# Altium PCB SkyDriver飞行控制器-IMU板V2.PcbDoc (part 2 of 2)
Units mil, origin at the board's own origin, x right, y up, seen from the top; angles counter-clockwise.
Board outline 1727.64 x 1728.17 mil, 2 copper layers (Top Layer, Bottom Layer); 60 components, 21 nets, 223 pads, 63 vias.
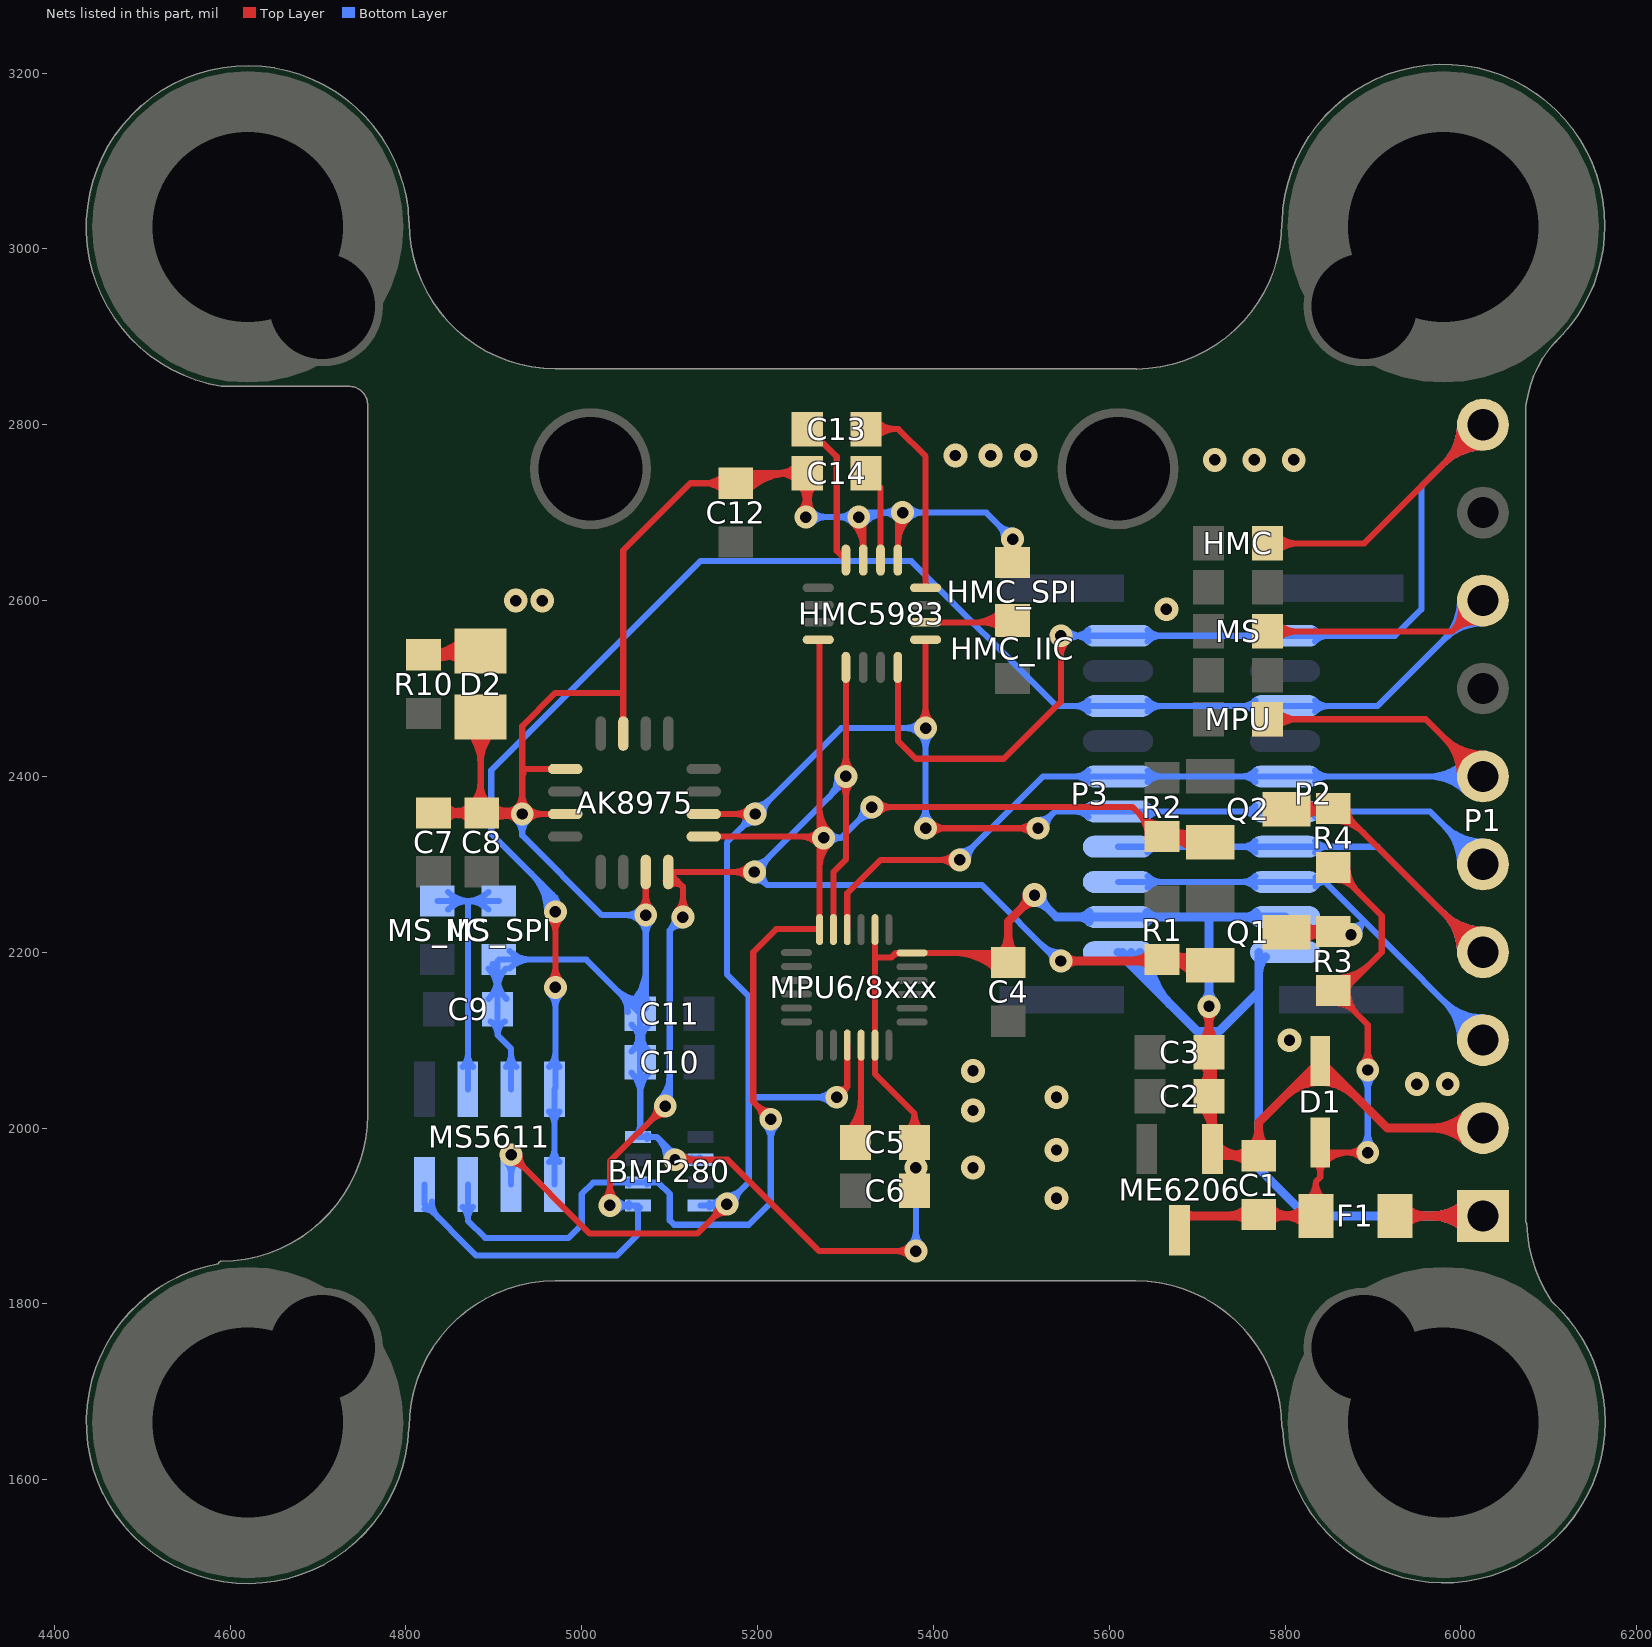
[diagram p2: the nets of this part, all layers, seen from the top]

## Via types
v1: diameter 26, hole 13, Top Layer to Bottom Layer, 43 vias
v2: diameter 27, hole 13, Top Layer to Bottom Layer, 20 vias

## Nets (pads, with @x,y where several pads share a name; then routed paths per layer and width w, separated by ;. In a path a pad name is that pad's centre, name@x,y a point inside that pad or via, vN(x,y) a via of type N, cw(c..) or ccw(c..) an arc to the next point about the centre after c; other vN are vias at no path point) (continued)
GND: AK8975.3 AK8975.11 AK8975.13 AK8975.15 BMP280.1 BMP280.7 C1.2 C2.2 C3.2 C4.2 C5.1 C6.1 C7.1 C8.2 C9.1 C10.2 C11.2 C12.1 C14.1 D1.1 D2.2 HMC5983.9 HMC5983.11 HMC_SPI.1 ME6206.3 MPU6/8xxx.11 MPU6/8xxx.18 MPU6/8xxx.20 MS5611.3 MS_SPI.1 P1.2 P2.2 P3.9 | length 8443.9
  Top Layer w3.5: C14.1@5255,2743.46 5256,2743.46 C14.1@5256,2745
  Top Layer w5: ME6206.3@5717.4,1976.26 5717.4,1968.47 ME6206.3@5720,1968.47
  Top Layer w7: C7.1@4831.38,2358.47 C8.2@4886.38,2358.47 C8.2@4887.64,2357.2 ; C7.1@4843.4,2348.41 cw(c4867.67,2324.14) 4867.67,2358.47 cw(c4867.67,2392.79) C7.1@4843.4,2368.52 ; C7.1@4845.01,2350.34 cw(c4856.4,2342.39) 4860,2355.81 ; C7.1@4845.01,2366.6 ccw(c4856.4,2374.54) 4860,2361.12 ; C7.1@4845.66,2351.36 cw(c4862.57,2341.59) 4857.51,2360.46 ; C7.1@4845.66,2365.57 ccw(c4862.57,2375.34) 4857.51,2356.48 ; D2.2@4869.38,2451.98 cw(c4831.67,2414.27) 4885,2414.27 cw(c4938.33,2414.27) D2.2@4900.62,2451.98 ; C8.2@4874.36,2348.41 ccw(c4850.09,2324.14) 4850.09,2358.47 ccw(c4850.09,2392.79) 4874.36,2368.52 ccw(c4848.67,2394.21) 4885,2394.21 ; D2.2@4874.33,2456.93 cw(c4848.57,2431.17) 4885,2431.17 cw(c4921.43,2431.17) D2.2@4895.67,2456.93 ; C8.2@4879.31,2363.57 ccw(c4865.57,2377.31) 4885,2377.31 ; 4885,2391.37 ccw(c4917.31,2391.37) C8.2@4894.46,2368.52 ; D2.2@4885,2467.6 4885,2363.46 4889,2363.46 4891.45,2361.01 C8.2@4887.64,2357.2 ; C8.2@4893.45,2363.57 ccw(c4908.82,2378.93) 4908.82,2357.2 ; C8.2@4898.4,2348.41 cw(c4919.62,2327.19) v1@4919.62,2357.2 ; C8.2@4898.4,2368.52 ccw(c4925.72,2395.83) v1@4925.72,2357.2 ; 4909.21,2361.63 ccw(c4914.51,2381.41) v1@4926.6,2364.87 ; 4910.07,2354.64 cw(c4914.19,2339.26) v1@4925.47,2350.5 ; 4913.53,2360.47 cw(c4909.08,2343.85) v1@4923.98,2352.45 ; 4916.8,2356.45 ccw(c4913.74,2367.86) v1@4923.98,2361.95 ; v1@4925.49,2350.49 ccw(c4909.27,2334.27) 4909.27,2357.2 ccw(c4909.27,2380.14) 4925.49,2363.92 ccw(c4909.27,2380.14) 4932.2,2380.14 ccw(c4955.14,2380.14) 4938.92,2363.92 ccw(c4955.14,2380.14) 4955.14,2357.2 ccw(c4955.14,2334.27) v1@4938.92,2350.49 ; 4933.39,2402.95 4933.39,2408.39 AK8975.13@4981.26,2408.39 ; AK8975.15@4981.26,2357.2 v1(4932.2,2357.2) ; 5045,2495 4970,2495 4932.2,2457.2 v1(4932.2,2357.2) ; AK8975.11@5047.2,2448.74 5047.2,2657.2 5123.47,2733.47 C12.1@5175,2733.47 ; v1@5066.08,2248.92 ccw(c5049.86,2265.14) 5072.8,2265.14 ccw(c5095.73,2265.14) v1@5079.51,2248.92 ; v1(5072.8,2242.2) AK8975.3@5072.8,2291.26 ; v1(5106,1964) 5166,1964 5270,1860 v1(5380,1860) ; v1@5112.72,1957.28 cw(c5128.94,1941.07) 5128.94,1964 cw(c5128.94,1986.93) v1@5112.72,1970.72 ; C12.1@5162.98,2723.41 ccw(c5138.71,2699.14) 5138.71,2733.47 ccw(c5138.71,2767.79) C12.1@5162.98,2743.52 ; C12.1@5177.12,2733.31 cw(c5205.34,2705.1) 5205.34,2745 ; C12.1@5182.07,2728.36 cw(c5222.24,2688.2) 5222.24,2745 ; C12.1@5186.53,2745 C14.1@5256,2745 ; C12.1@5187.02,2723.41 cw(c5239.14,2671.3) C14.1@5239.14,2745 ; C14.1@5243.25,2737.97 ccw(c5234.23,2734.52) 5232.83,2744.08 ccw(c5230.16,2762.38) C14.1@5245.07,2751.44 ; C14.1@5246.48,2732.98 cw(c5225.92,2712.42) 5255,2712.42 ; C14.1@5246.48,2734.95 ccw(c5222.21,2710.68) 5222.21,2745 ccw(c5222.21,2779.32) C14.1@5246.48,2755.05 ; v1@5248.28,2701.72 ccw(c5232.06,2717.93) 5255,2717.93 ccw(c5277.94,2717.93) v1@5261.72,2701.72 ; v1@5250.25,2703.23 ccw(c5243.2,2715.44) 5256.82,2711.79 ; v1(5255,2695) C14.1@5255,2743.46 ; v1@5255,2705 cw(c5294.57,2705) C14.1@5266.59,2732.98 ; 5255,2721.9 cw(c5277.67,2721.9) C14.1@5261.64,2737.93 ; 5259.14,2720.45 ccw(c5282.1,2714.3) v1@5262.74,2700.51 ; v1@5308.28,2688.28 cw(c5279.61,2659.61) HMC5983.11@5320.16,2659.61 ; v1@5313.23,2693.23 cw(c5296.51,2676.51) 5320.16,2676.51 ; v1(5315,2695) 5320.16,2689.84 HMC5983.11@5320.16,2646.02 ; MPU6/8xxx.20@5333.5,2225.74 5333.5,2194 ; 5353.24,2195.2 cw(c5361.96,2186.48) MPU6/8xxx.18@5361.96,2198.81 ; HMC5983.9@5359.53,2646.02 5359.53,2694.53 v1(5365,2700) ; 5359.53,2663.85 cw(c5401.15,2663.85) v1@5371.72,2693.28 ; 5359.53,2680.75 cw(c5384.25,2680.75) v1@5366.77,2698.23 ; C6.1@5368.41,1940.65 ccw(c5344.14,1964.91) 5378.47,1964.91 ccw(c5412.79,1964.91) C6.1@5388.52,1940.65 ; C5.1@5368.41,1971.6 cw(c5344.14,1947.33) 5378.47,1947.33 cw(c5412.79,1947.33) C5.1@5388.52,1971.6 ; C5.1@5369.21,1996.38 ccw(c5351.9,2016.53) 5378.47,2016.53 ; C6.1@5370.34,1942.26 ccw(c5362.39,1953.65) v1@5375.81,1957.24 ; C6.1@5371.36,1942.9 ccw(c5361.59,1959.82) v1@5380.46,1954.76 ; v1@5373.28,1853.28 ccw(c5357.06,1837.07) 5357.06,1860 ccw(c5357.06,1882.93) v1@5373.28,1866.72 ; C6.1@5373.28,1948.28 cw(c5360.77,1935.77) C6.1@5378.47,1935.77 ; v1@5373.28,1961.72 ccw(c5360.77,1974.23) C5.1@5378.47,1974.23 ; v1@5376.48,1954.76 ccw(c5395.34,1959.82) C6.1@5385.57,1942.9 ; C5.1@5378.47,1981.64 ccw(c5406.64,1981.64) v1@5386.72,1961.72 ; v1@5381.12,1957.24 ccw(c5394.54,1953.65) C6.1@5386.6,1942.26 ; C6.1@5386.68,1948.24 ccw(c5406.11,1928.58) C6.1@5378.47,1928.62 C5.1@5378.47,1983.62 5378.47,2016.54 ; C5.1@5387.73,1996.38 cw(c5405.03,2016.53) 5378.47,2016.53 ; 5422.69,2199.24 cw(c5422.69,2128.12) C4.2@5472.98,2178.41 ; 5439.59,2199.24 cw(c5439.59,2145.02) C4.2@5477.93,2183.36 ; 5456.49,2199.24 cw(c5456.49,2161.92) C4.2@5482.88,2188.31 ; C4.2@5479.22,2199.24 MPU6/8xxx.18@5375.74,2199.24 5357.29,2199.24 5352.05,2194 5333.5,2194 ; C2.2@5703.41,2048.4 ccw(c5679.14,2072.67) 5713.47,2072.67 ccw(c5747.79,2072.67) C2.2@5723.52,2048.4 ; C3.2@5703.41,2074.36 cw(c5679.14,2050.09) 5713.47,2050.09 cw(c5747.79,2050.09) C3.2@5723.52,2074.36 ; C3.2@5705.68,2072.52 cw(c5699.72,2063.41) 5710.23,2060.59 cw(c5726.46,2056.24) C3.2@5719.42,2071.5 ; C3.2@5707.51,2071.5 cw(c5700.47,2056.24) 5716.7,2060.59 cw(c5727.21,2063.41) C3.2@5721.25,2072.52 ; C2.2@5713.47,2036.38 C3.2@5713.47,2086.38 5717.4,2086.38 C3.2@5717.4,2082.44 ; C8.2@4887.64,2357.2 v1(4932.2,2357.2) ; 5333.5,2194 MPU6/8xxx.11@5333.5,2094.26 5333.5,2061.5 5378.47,2016.54
  Top Layer w10: C4.2@5476.01,2197.46 ccw(c5454.3,2219.17) 5485,2219.17 ccw(c5515.7,2219.17) C4.2@5493.99,2197.46 ; C4.2@5480,2198.47 C4.2@5485,2193.47 ; C4.2@5485,2188.47 C4.2@5485,2193.47 ; C4.2@5490,2188.47 C4.2@5485,2193.47 ; v2@5506.5,2265 cw(c5485.98,2265) 5500.49,2250.49 cw(c5515,2235.98) v2@5515,2256.5 ; v2(5515,2265) 5485,2235 C4.2@5485,2193.47 ; C2.2@5704.47,2025.42 cw(c5673.26,1994.21) ME6206.3@5717.4,1994.21 ; C2.2@5704.47,2047.34 ccw(c5673.26,2078.55) C3.2@5717.4,2078.55 ; C3.2@5704.47,2075.42 cw(c5673.26,2044.21) C2.2@5717.4,2044.21 ; C3.2@5704.47,2097.34 ccw(c5682.77,2119.05) 5713.47,2119.05 ccw(c5744.17,2119.05) C3.2@5722.46,2097.34 ; v1@5707.81,2132.81 cw(c5694.15,2119.15) 5713.47,2119.15 cw(c5732.78,2119.15) v1@5719.12,2132.81 ; C3.2@5710.01,2072.17 cw(c5708.5,2066.82) 5713.87,2065.38 ; ME6206.3@5712.59,1997.81 ccw(c5700.96,2009.44) 5717.4,2009.44 ccw(c5733.85,2009.44) ME6206.3@5722.22,1997.81 ; C3.2@5713.47,2086.38 v1(5713.47,2138.47) ; 5713.98,2065.78 cw(c5726.09,2062.54) C3.2@5719.82,2073.4 ; ME6206.3@5715.15,1974.01 ccw(c5728.52,1987.38) ME6206.3@5728.52,1968.47 ; ME6206.3@5717.4,1976.26 C3.2@5717.4,2082.44 ; 5717.4,2013.21 cw(c5734.66,2013.21) C2.2@5722.46,2025.42 ; 5717.4,2059.54 ccw(c5734.66,2059.54) C2.2@5722.46,2047.34 ; 5717.4,2063.21 cw(c5734.66,2063.21) C3.2@5722.46,2075.42 ; ME6206.3@5720,1968.47 C1.2@5770,1968.47 5770,2006.26 D1.1@5840,2076.26 5916.26,2000 P1.2@6025,2000 ; ME6206.3@5722.22,1981.08 ccw(c5752.66,2011.52) C1.2@5752.66,1968.47 ; C1.2@5759.04,1959.47 ccw(c5737.33,1937.77) 5737.33,1968.47 ccw(c5737.33,1999.17) C1.2@5759.04,1977.46 ; C1.2@5761.01,1977.46 ccw(c5739.3,1999.17) 5770,1999.17 ccw(c5800.7,1999.17) C1.2@5778.99,1977.46 ; 5799.81,2036.07 cw(c5840,1995.88) 5840,2052.72 cw(c5840,1995.88) 5880.19,2036.07 ; 5816.88,2053.14 cw(c5840,2030.02) 5840,2062.72 cw(c5840,2030.02) 5863.12,2053.14 ; D1.1@5833.95,2070.21 cw(c5840,2064.16) 5840,2072.72 cw(c5840,2064.16) D1.1@5846.05,2070.21 ; P1.2@6007.66,1982.66 ccw(c5965.79,1940.79) 5965.79,2000 ccw(c5965.79,2059.21) P1.2@6007.66,2017.34 ; P1.2@6014.73,1989.73 ccw(c5989.93,1964.93) 5989.93,2000 ccw(c5989.93,2035.07) P1.2@6014.73,2010.27
  Bottom Layer w7: MS_SPI.1@4893.73,2181.48 cw(c4868.41,2156.16) 4904.21,2156.16 ; C9.1@4894.16,2147.02 ccw(c4869.89,2171.29) 4904.21,2171.29 ccw(c4938.54,2171.29) C9.1@4914.27,2147.02 ; C9.1@4896.08,2121.37 cw(c4885.22,2105.79) 4904.21,2105.79 ; MS_SPI.1@4898.68,2186.43 cw(c4885.31,2173.06) 4904.21,2173.06 ; 4904.21,2158.26 cw(c4937.05,2158.26) MS_SPI.1@4913.83,2181.48 ; MS_SPI.1@4904.21,2190 C9.1@4904.21,2135 4904.21,2105.79 ; MS_SPI.1@4905.75,2191.53 5005,2191.53 C11.2@5066.54,2130 BMP280.1@5066.54,1992.54 ; C9.1@4912.34,2121.37 ccw(c4923.21,2105.79) 4904.21,2105.79 ; MS5611.3@4913.73,2069.77 ccw(c4899.54,2083.96) 4919.61,2083.96 ccw(c4939.67,2083.96) MS5611.3@4925.48,2069.77 ; MS_SPI.1@4917.77,2181.48 cw(c4942.04,2157.21) 4942.04,2191.53 cw(c4942.04,2225.86) MS_SPI.1@4917.77,2201.59 ; MS5611.3@4919.61,2044.21 4919.61,2090.39 4904.21,2105.79 ; v1@4925.49,2350.49 cw(c4909.27,2334.27) 4932.2,2334.27 cw(c4955.14,2334.27) v1@4938.92,2350.49 ; v1(4932.2,2357.2) 4932.2,2332.8 5022.8,2242.2 v1(5072.8,2242.2) 5072.8,2136.26 C11.2@5070,2139.06 ; 5038.91,2157.63 ccw(c5066.54,2185.26) C11.2@5066.54,2146.19 ; 5043.66,2152.88 cw(c5022.75,2131.97) C11.2@5052.32,2131.97 ; C11.2@5050.86,2145.68 ccw(c5066.54,2161.36) C11.2@5066.54,2139.19 ; C10.2@5056.48,2087.02 ccw(c5032.21,2111.29) 5066.54,2111.29 ccw(c5100.86,2111.29) C10.2@5076.59,2087.02 ; C11.2@5056.48,2117.98 cw(c5032.21,2093.71) 5066.54,2093.71 cw(c5100.86,2093.71) C11.2@5076.59,2117.98 ; C11.2@5056.48,2142.02 ccw(c5017.1,2181.4) 5072.8,2181.4 ; C10.2@5058.41,2088.63 ccw(c5050.47,2100.02) 5063.88,2103.62 ; C10.2@5059.43,2089.28 ccw(c5049.66,2106.2) 5068.53,2101.14 ; C11.2@5061.43,2137.07 ccw(c5034,2164.5) 5072.8,2164.5 ; BMP280.1@5061.6,1992.4 ccw(c5049.69,2004.31) 5066.54,2004.31 ; BMP280.1@5064,1990 5085,1990 v1@5111,1964 ; 5064.55,2101.13 ccw(c5083.4,2106.19) C10.2@5073.64,2089.28 ; v1@5066.08,2248.92 cw(c5049.86,2265.14) 5049.86,2242.2 cw(c5049.86,2219.27) 5066.08,2235.49 cw(c5049.86,2219.27) 5072.8,2219.27 cw(c5095.73,2219.27) v1@5079.51,2235.49 ; 5066.53,2011.47 C10.2@5066.53,2075 ; 5069.19,2103.62 ccw(c5082.61,2100.03) C10.2@5074.67,2088.63 ; 5072.8,2151.18 ccw(c5085.74,2151.18) C11.2@5076.59,2142.02 ; BMP280.1@5074.27,1987.6 cw(c5080.06,1981.82) 5080.06,1990 cw(c5080.06,1998.18) BMP280.1@5074.27,1992.4 ; 5086.25,1988.75 cw(c5061.49,1964) v1@5096.5,1964 ; 5098.2,1976.8 cw(c5085.39,1964) v1@5103.5,1964 ; 5098.32,1976.68 ccw(c5106,1984.36) v1@5106,1973.5 ; v1(5106,1964) v1@5111,1964 ; v1@5113,1965 BMP280.7@5134,1965 ; v1@5116.53,1965 cw(c5116.53,1953.4) 5124.73,1961.6 ccw(c5118.94,1955.82) 5118.94,1964 ccw(c5118.94,1972.18) BMP280.7@5124.73,1966.4 ; BMP280.7@5126.52,1965 cw(c5126.52,1984.52) 5112.72,1970.72 ccw(c5128.94,1986.93) 5128.94,1964 ccw(c5128.94,1941.07) 5112.72,1957.28 cw(c5131.35,1938.65) BMP280.7@5131.35,1965 ; BMP280.7@5135,1964 v1@5111,1964 ; v1(5255,2695) v1(5315,2695) 5320,2700 v1(5365,2700) 5460,2700 v1(5490,2670) ; v1@5261.72,2688.28 cw(c5277.94,2672.07) 5277.94,2695 cw(c5277.94,2717.93) v1@5261.72,2701.72 ; v1@5308.28,2688.28 ccw(c5292.06,2672.07) 5292.06,2695 ccw(c5292.06,2717.93) v1@5308.28,2701.72 ; v1@5316.77,2693.23 cw(c5333.11,2676.89) 5333.11,2700 ; v1@5321.72,2688.28 cw(c5350.01,2659.99) 5350.01,2700 ; v1@5358.28,2693.28 ccw(c5342.06,2677.07) 5342.06,2700 ccw(c5342.06,2722.93) v1@5358.28,2706.72 ; v1@5371.72,2693.28 cw(c5387.94,2677.07) 5387.94,2700 cw(c5387.94,2722.93) v1@5371.72,2706.72 ; v1@5373.28,1866.72 ccw(c5357.06,1882.93) 5380,1882.93 ccw(c5402.94,1882.93) v1@5386.72,1866.72 ; v1@5373.28,1948.28 cw(c5357.06,1932.07) 5380,1932.07 cw(c5402.94,1932.07) v1@5386.72,1948.28 ; v1(5380,1860) v1(5380,1955) ; v1@5480.5,2670 ccw(c5457.56,2670) 5473.78,2686.22 ccw(c5490,2702.43) v1@5490,2679.5 ; 5066.53,2038.71 ccw(c5032.21,2038.71) 5056.48,2062.98 cw(c5032.21,2038.71) 5066.53,2038.71 ; 5066.53,2038.71 cw(c5100.86,2038.71) 5076.59,2062.98 ccw(c5100.86,2038.71) 5066.53,2038.71
  Bottom Layer w10: BMP280.7@5134,1965 BMP280.7@5135,1964 ; v2@5515,2256.5 cw(c5515,2235.98) 5529.51,2250.49 cw(c5544.02,2265) v2@5523.5,2265 ; v2(5515,2265) 5540,2240 P3.9@5610,2240 P2.2@5800,2240 ; P3.9@5577.2,2234.7 ccw(c5564.39,2221.89) 5564.39,2240 ccw(c5564.39,2258.11) P3.9@5577.2,2245.3 ; P3.9@5642.8,2234.7 cw(c5655.61,2221.89) 5655.61,2240 cw(c5655.61,2258.11) P3.9@5642.8,2245.3 ; v1@5707.81,2144.12 ccw(c5694.15,2157.78) 5713.47,2157.78 ccw(c5732.78,2157.78) v1@5719.12,2144.12 ; v1(5713.47,2138.47) 5713.47,2238.47 ; P2.2@5767.2,2234.7 ccw(c5754.39,2221.89) 5754.39,2240 ccw(c5754.39,2258.11) P2.2@5767.2,2245.3
  other v2: 5540,1920 5445,1955 5540,1975 5445,2020 5540,2035 5950,2050 5985,2050 5445,2065 5805,2100 5665,2590 4925,2600 4955,2600 5720,2760 5765,2760 5810,2760 5425,2765 5465,2765 5505,2765
HMC_CS: HMC5983.4 HMC.2 P1.10 P2.10 P3.1 | length 1945.9
  Top Layer w7: HMC5983.4@5359.53,2523.98 5359.53,2440.47 5380,2420 5480,2420 5545,2485 v1(5545,2560) ; v1@5538.28,2553.28 cw(c5522.06,2537.07) 5545,2537.07 cw(c5567.94,2537.07) v1@5551.72,2553.28 ; HMC.2@5780,2665 5890,2665 P1.10@6025,2800 ; HMC.2@5790.05,2654.95 cw(c5814.32,2630.68) 5814.32,2665 cw(c5814.32,2699.32) HMC.2@5790.05,2675.05 ; P1.10@5998.97,2800 cw(c5936.14,2800) 5980.57,2755.57 cw(c6025,2711.14) P1.10@6025,2773.97 ; P1.10@6005.97,2800 cw(c5960.04,2800) 5992.52,2767.52 cw(c6025,2735.04) P1.10@6025,2780.97
  Bottom Layer w7: v1(5545,2560) P3.1@5610,2560 P2.10@5800,2560 5925,2560 5955,2590 5955,2730 P1.10@6025,2800 ; v1@5551.72,2553.28 cw(c5567.94,2537.07) 5567.94,2560 cw(c5567.94,2582.93) v1@5551.72,2566.72 ; P3.1@5576.14,2553.64 ccw(c5560.77,2538.27) 5560.77,2560 ccw(c5560.77,2581.73) P3.1@5576.14,2566.36 ; P3.1@5643.86,2553.64 cw(c5659.23,2538.27) 5659.23,2560 cw(c5659.23,2581.73) P3.1@5643.86,2566.36 ; P2.10@5766.14,2553.64 ccw(c5750.77,2538.27) 5750.77,2560 ccw(c5750.77,2581.73) P2.10@5766.14,2566.36 ; P2.10@5833.86,2553.64 cw(c5849.23,2538.27) 5849.23,2560 cw(c5849.23,2581.73) P2.10@5833.86,2566.36 ; P1.10@5998.97,2800 cw(c5936.14,2800) 5980.57,2755.57 cw(c6025,2711.14) P1.10@6025,2773.97 ; P1.10@6005.97,2800 cw(c5960.04,2800) 5992.52,2767.52 cw(c6025,2735.04) P1.10@6025,2780.97
HSCL/SCLK: P1.3 P2.3 P3.8 Q1.3 R3.1 | length 1316.6
  Top Layer w7: Q1.3@5801.61,2222.6 R3.1@5854.13,2222.6 ; Q1.3@5815.98,2216.1 cw(c5831.66,2200.42) 5831.66,2222.6 cw(c5831.66,2244.77) Q1.3@5815.98,2229.09 ; Q1.3@5816.61,2222.6 ccw(c5816.61,2259.88) R3.1@5842.98,2233.52 ; Q1.3@5820.81,2222.6 cw(c5820.81,2191.24) R3.1@5842.98,2213.41 ; Q1.3@5820.93,2211.15 cw(c5848.56,2183.52) 5848.56,2222.6 cw(c5848.56,2261.67) Q1.3@5820.93,2234.04 ; Q1.3@5823.67,2230.39 ccw(c5830.23,2234) 5832.17,2226.77 ccw(c5834.61,2217.68) Q1.3@5825.37,2219.49 ; Q1.3@5824.36,2216.21 cw(c5829.99,2213.78) 5831.58,2219.71 cw(c5833.87,2228.26) Q1.3@5825.25,2226.26 ; 5833.51,2222.6 ccw(c5833.51,2242.98) R3.1@5847.93,2228.57 ; R3.1@5858.34,2222.6 ccw(c5858.34,2236.66) R3.1@5868.28,2226.72 ; R3.1@5865.67,2218.24 ccw(c5860.4,2217.24) R3.1@5860.4,2222.6 ; R3.1@5866.76,2215.28 ccw(c5854.13,2208.06) R3.1@5854.13,2222.6 ; R3.1@5867.66,2226.03 cw(c5860.4,2231.99) R3.1@5860.4,2222.6 ; R3.1@5854.13,2222.6 R3.1@5860.4,2222.6
  Top Layer w10: Q1.3@5801.61,2222.6 5854.13,2222.6 R3.1@5855,2223.47 ; Q1.3@5819.87,2212.21 cw(c5844.94,2187.15) 5844.94,2222.6 cw(c5844.94,2258.05) Q1.3@5819.87,2232.98 ; Q1.3@5820.24,2222.6 ccw(c5820.24,2256.26) R3.1@5844.04,2232.46 ; Q1.3@5822.14,2230.06 ccw(c5830.04,2234.72) 5832.41,2225.86 ccw(c5835.9,2212.86) Q1.3@5823.27,2217.52 ; Q1.3@5822.8,2216.4 cw(c5829.82,2213.14) 5831.83,2220.62 cw(c5835.26,2233.44) Q1.3@5823.02,2228.29 ; Q1.3@5824.43,2222.6 cw(c5824.43,2194.86) R3.1@5844.04,2214.47
  Bottom Layer w7: P3.8@5610,2280 P2.3@5800,2280 5845,2280 ; P3.8@5643.86,2273.64 cw(c5659.23,2258.27) 5659.23,2280 cw(c5659.23,2301.73) P3.8@5643.86,2286.36 ; P2.3@5766.14,2273.64 ccw(c5750.77,2258.27) 5750.77,2280 ccw(c5750.77,2301.73) P2.3@5766.14,2286.36 ; P2.3@5834.82,2274.77 cw(c5845,2267.49) 5845,2280 ; P2.3@5834.82,2285.23 ccw(c5845,2292.51) 5845,2280 ; v1(5875,2220) 5890,2235 ; v1@5875.54,2229.48 ccw(c5876.61,2248.39) 5890,2235 ; v1@5884.48,2220.54 cw(c5903.39,2221.61) 5890,2235 ; P1.3@5998.97,2100 ccw(c5936.14,2100) 5980.57,2144.43 ccw(c6025,2188.86) P1.3@6025,2126.03 ; P1.3@6005.97,2100 ccw(c5960.04,2100) 5992.52,2132.48 ccw(c6025,2164.96) P1.3@6025,2119.03 ; P1.3@6025,2100 5890,2235 ; 5845,2280 5890,2235
HSDA/SDI: P1.4 P2.4 P3.7 Q2.3 R4.1 | length 1686.1
  Top Layer w7: Q2.3@5801.61,2362.6 5854.13,2362.6 5862.4,2362.6 P1.4@6025,2200 ; Q2.3@5815.98,2356.1 cw(c5831.66,2340.42) 5831.66,2362.6 cw(c5831.66,2384.77) Q2.3@5815.98,2369.09 ; Q2.3@5816.61,2362.6 ccw(c5816.61,2399.88) R4.1@5842.98,2373.52 ; Q2.3@5820.81,2362.6 cw(c5820.81,2331.24) R4.1@5842.98,2353.41 ; Q2.3@5820.93,2351.15 cw(c5848.56,2323.52) 5848.56,2362.6 cw(c5848.56,2401.67) Q2.3@5820.93,2374.04 ; Q2.3@5823.67,2370.39 ccw(c5830.23,2374) 5832.17,2366.77 ccw(c5834.61,2357.68) Q2.3@5825.37,2359.49 ; Q2.3@5824.36,2356.21 cw(c5829.99,2353.78) 5831.58,2359.71 cw(c5833.87,2368.26) Q2.3@5825.25,2366.26 ; 5833.51,2362.6 ccw(c5833.51,2382.98) R4.1@5847.93,2368.57 ; R4.1@5856.97,2349.25 cw(c5856.97,2303.91) 5889.03,2335.97 ; R4.1@5856.97,2356.25 cw(c5856.97,2327.81) 5877.08,2347.92 ; R4.1@5871.18,2363.47 ccw(c5894.48,2363.47) 5878.01,2346.99 ; P1.4@5998.97,2200 ccw(c5936.14,2200) 5980.57,2244.43 ccw(c6025,2288.86) P1.4@6025,2226.03 ; P1.4@6005.97,2200 ccw(c5960.04,2200) 5992.52,2232.48 ccw(c6025,2264.96) P1.4@6025,2219.03
  Top Layer w10: Q2.3@5801.61,2362.6 5854.13,2362.6 R4.1@5855,2363.47 ; Q2.3@5819.87,2352.21 cw(c5844.94,2327.15) 5844.94,2362.6 cw(c5844.94,2398.05) Q2.3@5819.87,2372.98 ; Q2.3@5820.24,2362.6 ccw(c5820.24,2396.26) R4.1@5844.04,2372.46 ; Q2.3@5822.14,2370.06 ccw(c5830.04,2374.72) 5832.41,2365.86 ccw(c5835.9,2352.86) Q2.3@5823.27,2357.52 ; Q2.3@5822.8,2356.4 cw(c5829.82,2353.14) 5831.83,2360.62 cw(c5835.26,2373.44) Q2.3@5823.02,2368.29 ; Q2.3@5824.43,2362.6 cw(c5824.43,2334.86) R4.1@5844.04,2354.47
  Bottom Layer w7: P3.7@5610,2320 P2.4@5800,2320 5905,2320 P1.4@6025,2200 ; P3.7@5643.86,2313.64 cw(c5659.23,2298.27) 5659.23,2320 cw(c5659.23,2341.73) P3.7@5643.86,2326.36 ; P2.4@5766.14,2313.64 ccw(c5750.77,2298.27) 5750.77,2320 ccw(c5750.77,2341.73) P2.4@5766.14,2326.36 ; P2.4@5833.86,2313.64 cw(c5849.23,2298.27) 5849.23,2320 cw(c5849.23,2341.73) P2.4@5833.86,2326.36 ; P1.4@5998.97,2200 ccw(c5936.14,2200) 5980.57,2244.43 ccw(c6025,2288.86) P1.4@6025,2226.03 ; P1.4@6005.97,2200 ccw(c5960.04,2200) 5992.52,2232.48 ccw(c6025,2264.96) P1.4@6025,2219.03
MPU_CS: MPU6/8xxx.22 MPU.2 P1.6 P2.6 P3.5 | length 1695.5
  Top Layer w7: MPU6/8xxx.22@5302,2225.74 5302,2267 5340,2305 v1(5430,2305) ; v1@5423.28,2298.28 ccw(c5407.06,2282.07) 5407.06,2305 ccw(c5407.06,2327.93) v1@5423.28,2311.72 ; MPU.2@5780,2465 5960,2465 P1.6@6025,2400 ; MPU.2@5790.05,2454.95 cw(c5814.32,2430.68) 5814.32,2465 cw(c5814.32,2499.32) MPU.2@5790.05,2475.05 ; P1.6@5998.97,2400 ccw(c5936.14,2400) 5980.57,2444.43 ccw(c6025,2488.86) P1.6@6025,2426.03 ; P1.6@6005.97,2400 ccw(c5960.04,2400) 5992.52,2432.48 ccw(c6025,2464.96) P1.6@6025,2419.03
  Bottom Layer w7: v1(5430,2305) 5525,2400 P3.5@5610,2400 P2.6@5800,2400 P1.6@6025,2400 ; v1@5430,2314.5 ccw(c5430,2337.43) 5446.22,2321.22 ccw(c5462.44,2305) v1@5439.5,2305 ; P3.5@5576.14,2393.64 ccw(c5560.77,2378.27) 5560.77,2400 ccw(c5560.77,2421.73) P3.5@5576.14,2406.36 ; P3.5@5643.86,2393.64 cw(c5659.23,2378.27) 5659.23,2400 cw(c5659.23,2421.73) P3.5@5643.86,2406.36 ; P2.6@5766.14,2393.64 ccw(c5750.77,2378.27) 5750.77,2400 ccw(c5750.77,2421.73) P2.6@5766.14,2406.36 ; P2.6@5833.86,2393.64 cw(c5849.23,2378.27) 5849.23,2400 cw(c5849.23,2421.73) P2.6@5833.86,2406.36 ; P1.6@6006.6,2381.6 ccw(c5962.16,2337.16) 5962.16,2400 ccw(c5962.16,2462.84) P1.6@6006.6,2418.4 ; P1.6@6011.55,2386.55 ccw(c5979.06,2354.06) 5979.06,2400 ccw(c5979.06,2445.94) P1.6@6011.55,2413.45
MS_CS: MS5611.4 MS5611.5 MS.2 P1.8 P2.8 P3.3 | length 2908
  Top Layer w7: v1@4963.28,2166.72 ccw(c4947.06,2182.93) 4970,2182.93 ccw(c4992.94,2182.93) v1@4976.72,2166.72 ; v1@4963.28,2239.28 cw(c4947.06,2223.07) 4970,2223.07 cw(c4992.94,2223.07) v1@4976.72,2239.28 ; v1(4970,2160) v1(4970,2246) ; MS.2@5780,2565 5990,2565 ; MS.2@5790.05,2554.95 cw(c5814.32,2530.68) 5814.32,2565 cw(c5814.32,2599.32) MS.2@5790.05,2575.05 ; P1.8@5999.41,2595.27 cw(c5965.93,2589.07) 5990,2565 ; P1.8@6006.29,2596.54 cw(c5981.82,2592.01) 5999.42,2574.42 cw(c6017.01,2556.82) P1.8@6021.54,2581.29 ; P1.8@6020.27,2574.41 ccw(c6014.07,2540.93) 5990,2565 ; P1.8@6025,2600 5990,2565
  Bottom Layer w7: 4942.47,2289.53 cw(c4898.94,2246) v1@4960.5,2246 ; 4954.42,2277.58 cw(c4922.84,2246) v1@4967.5,2246 ; MS5611.5@4962.94,1961.35 ccw(c4948.75,1975.54) 4968.82,1975.54 ccw(c4988.88,1975.54) MS5611.5@4974.69,1961.35 ; MS5611.4@4962.94,2018.65 cw(c4948.75,2004.46) 4968.82,2004.46 cw(c4988.88,2004.46) MS5611.4@4974.69,2018.65 ; MS5611.4@4962.94,2069.77 ccw(c4945.9,2086.82) 4970,2086.82 ; v1@4963.28,2153.28 cw(c4947.06,2137.07) 4970,2137.07 cw(c4992.94,2137.07) v1@4976.72,2153.28 ; v1@4965.45,2254.34 ccw(c4961.28,2262) 4970,2262 ; 4966.37,2265.63 cw(c4946.74,2246) v1@4974.5,2246 ; MS5611.5@4968.82,1935.79 MS5611.4@4968.82,2044.21 4970,2045.39 v1(4970,2160) ; 4970,2081.11 ccw(c4986.03,2081.11) MS5611.4@4974.69,2069.77 ; v1(4970,2246) 4970,2262 ; v1@4974.55,2254.34 cw(c4978.72,2262) 4970,2262 ; P3.3@5576.14,2473.64 ccw(c5560.77,2458.27) 5560.77,2480 ccw(c5560.77,2501.73) P3.3@5576.14,2486.36 ; P3.3@5643.86,2473.64 cw(c5659.23,2458.27) 5659.23,2480 cw(c5659.23,2501.73) P3.3@5643.86,2486.36 ; P2.8@5766.14,2473.64 ccw(c5750.77,2458.27) 5750.77,2480 ccw(c5750.77,2501.73) P2.8@5766.14,2486.36 ; P2.8@5833.86,2473.64 cw(c5849.23,2458.27) 5849.23,2480 cw(c5849.23,2501.73) P2.8@5833.86,2486.36 ; P1.8@5998.97,2600 cw(c5936.14,2600) 5980.57,2555.57 cw(c6025,2511.14) P1.8@6025,2573.97 ; P1.8@6005.97,2600 cw(c5960.04,2600) 5992.52,2567.52 cw(c6025,2535.04) P1.8@6025,2580.97 ; P1.8@6025,2600 5905,2480 P2.8@5800,2480 P3.3@5610,2480 5540,2480 5375,2645 5135,2645 4897,2407 4897,2335 4970,2262
NetC5_2: C5.2 MPU6/8xxx.10 | length 201.1
  Top Layer w3.5: C5.2@5311.54,1983.62 5311.54,1989.84 C5.2@5317.75,1989.84
  Top Layer w7: C5.2@5301.48,1995.65 ccw(c5262.22,2034.91) 5317.75,2034.91 ; C5.2@5306.43,1990.7 ccw(c5279.12,2018.01) 5317.75,2018.01 ; C5.2@5317.75,1989.84 MPU6/8xxx.10@5317.75,2094.26 ; 5317.75,2004.92 ccw(c5330.86,2004.92) C5.2@5321.59,1995.65
NetC13_1: C13.1 HMC5983.8 | length 283.8
  Top Layer w7: C13.1@5323.47,2795 5360,2795 5391.02,2763.98 HMC5983.8@5391.02,2614.53 ; C13.1@5333.52,2784.95 cw(c5357.79,2760.68) 5357.79,2795 cw(c5357.79,2829.32) C13.1@5333.52,2805.05
NetC13_2: C13.2 HMC5983.12 | length 168.5
  Top Layer w7: C13.2@5256.54,2795 5258.78,2795 5290,2763.78 5290,2656.5 HMC5983.12@5300.47,2646.02
NetC14_2: C14.2 HMC5983.10 | length 105.8
  Top Layer w7: C14.2@5323.47,2745 5339.84,2728.62 HMC5983.10@5339.84,2646.02
NetD2_1: D2.1 R10.1 | length 348.9
  Top Layer w3.5: D2.1@4881.06,2538.47 4881.06,2542.4 D2.1@4885,2542.4
  Top Layer w7: R10.1@4832.02,2528.41 cw(c4856.29,2504.14) 4856.29,2538.47 cw(c4856.29,2572.79) R10.1@4832.02,2548.52 ; R10.1@4836.43,2538.47 ccw(c4836.43,2585.25) D2.1@4870.18,2552.85 ; R10.1@4837.23,2538.47 cw(c4837.23,2498.57) D2.1@4865.44,2526.78 ; 4852.85,2538.47 ccw(c4852.85,2569.49) D2.1@4875.23,2548 ; 4853.95,2537.84 cw(c4857.81,2523.43) D2.1@4869.37,2532.86 ; 4854.13,2538.47 cw(c4854.13,2515.47) D2.1@4870.39,2531.73 ; D2.1@4860.43,2550.3 cw(c4837,2559.27) 4843.5,2535.04 cw(c4848.62,2515.93) D2.1@4863.95,2528.44 ; D2.1@4865.13,2557.7 cw(c4820,2601.01) R10.1@4820,2538.47 D2.1@4881.06,2538.47
NetHMC5983_6: HMC5983.6 HMC_IIC.2 HMC_SPI.2 | length 249.2
  Top Layer w7: HMC5983.6@5391.02,2575.16 5488.62,2575.16 HMC_SPI.2@5490,2576.54 HMC_IIC.2@5490,2578.46 ; 5445.73,2575.16 ccw(c5445.73,2620.77) HMC_IIC.2@5477.98,2588.52 ; 5450.38,2575.16 ccw(c5450.38,2614.18) HMC_IIC.2@5477.98,2586.59 ; 5457.04,2575.16 cw(c5457.04,2545.54) HMC_IIC.2@5477.98,2566.48 ; 5461.69,2575.16 cw(c5461.69,2552.12) HMC_IIC.2@5477.98,2568.41 ; 5462.63,2575.16 ccw(c5462.63,2603.87) HMC_IIC.2@5482.93,2583.57 ; 5467.28,2575.16 ccw(c5467.28,2597.28) HMC_IIC.2@5482.93,2581.64
NetMS5611_2: MS5611.2 MS_IIC.2 MS_SPI.2 | length 507
  Bottom Layer w7: MS_IIC.2@4847.77,2248.41 cw(c4872.04,2224.14) 4872.04,2258.46 cw(c4872.04,2292.79) MS_IIC.2@4847.77,2268.52 ; MS_IIC.2@4848.2,2248.87 cw(c4870,2228.92) 4870,2258.46 ; MS_IIC.2@4848.2,2268.06 ccw(c4870,2288.01) 4870,2258.46 ; MS5611.2@4864.52,2069.77 ccw(c4850.33,2083.96) 4870.39,2083.96 ccw(c4890.46,2083.96) MS5611.2@4876.27,2069.77 ; MS5611.2@4870.39,2044.21 4870.39,2258.07 4870,2258.46 ; MS_SPI.2@4893.73,2248.41 ccw(c4869.46,2224.14) 4869.46,2258.46 ccw(c4869.46,2292.79) MS_SPI.2@4893.73,2268.52 ; MS_SPI.2@4905.75,2258.46 MS_IIC.2@4835.75,2258.46 4870,2258.46
SA0/SDO: AK8975.6 BMP280.5 HMC5983.5 MPU6/8xxx.9 MS5611.6 P1.5 P2.5 P3.6 | length 3110.7
  Top Layer w7: v1@4919.61,1960.11 cw(c4919.61,1937.17) 4935.82,1953.39 cw(c4952.04,1969.61) v1@4929.11,1969.61 ; v1(4919.61,1969.61) 5009.21,1880 5131.5,1880 v1(5165,1913.5) ; AK8975.6@5138.74,2357.2 v1(5197.2,2357.2) ; v1@5155.5,1913.5 cw(c5132.56,1913.5) 5148.78,1897.28 cw(c5165,1881.07) v1@5165,1904 ; v1@5190.49,2350.49 ccw(c5174.27,2334.27) 5174.27,2357.2 ccw(c5174.27,2380.14) v1@5190.49,2363.92 ; v1(5290,2035) 5302,2047 ; v1@5292.21,2044.24 ccw(c5294.64,2054.36) 5302,2047 ; v1@5299.24,2037.21 cw(c5309.36,2039.64) 5302,2047 ; MPU6/8xxx.9@5302,2094.26 5302,2047 ; v1@5384.31,2461.72 ccw(c5368.09,2477.93) 5391.02,2477.93 ccw(c5413.96,2477.93) v1@5397.74,2461.72 ; v1(5391.02,2341.02) v1(5518.98,2341.02) ; v1(5391.02,2455) HMC5983.5@5391.02,2555.47 ; v1@5397.74,2334.31 cw(c5413.96,2318.09) 5413.96,2341.02 cw(c5413.96,2363.96) v1@5397.74,2347.74 ; v1@5512.26,2334.31 ccw(c5496.04,2318.09) 5496.04,2341.02 ccw(c5496.04,2363.96) v1@5512.26,2347.74
  Bottom Layer w7: MS5611.6@4912.89,1962.89 cw(c4896.67,1946.67) 4919.61,1946.67 cw(c4942.54,1946.67) MS5611.6@4926.32,1962.89 ; MS5611.6@4915.57,1962.74 ccw(c4911.75,1969.61) v1(4919.61,1969.61) ; MS5611.6@4919.61,1935.79 v1(4919.61,1969.61) ; MS5611.6@4923.65,1962.74 cw(c4927.47,1969.61) v1(4919.61,1969.61) ; BMP280.5@5135,1912 v1@5165,1912 ; BMP280.5@5138.44,1912 ccw(c5138.44,1940.06) v1@5158.28,1920.22 ; BMP280.5@5145.27,1909.6 cw(c5151.06,1903.82) 5151.06,1912 cw(c5151.06,1920.18) BMP280.5@5145.27,1914.4 ; BMP280.5@5145.69,1912 cw(c5145.69,1894.19) v1@5158.28,1906.78 ; v1(5165,1913.5) 5190,1938.5 5190,2035 ; v1@5165,1923 ccw(c5165,1945.93) 5181.22,1929.72 ccw(c5197.44,1913.5) v1@5174.5,1913.5 ; v1@5187.7,2357.2 cw(c5164.77,2357.2) 5180.99,2340.99 cw(c5197.2,2324.77) v1@5197.2,2347.7 ; v1@5197.2,2366.7 ccw(c5197.2,2389.64) 5213.42,2373.42 ccw(c5229.64,2357.2) v1@5206.7,2357.2 ; v1@5283.28,2028.28 ccw(c5267.06,2012.07) 5267.06,2035 ccw(c5267.06,2057.93) v1@5283.28,2041.72 ; v1(5290,2035) 5190,2035 ; v1@5384.31,2347.74 ccw(c5368.09,2363.96) 5391.02,2363.96 ccw(c5413.96,2363.96) v1@5397.74,2347.74 ; v1@5384.31,2461.72 cw(c5368.09,2477.93) 5368.09,2455 cw(c5368.09,2432.07) 5384.31,2448.28 cw(c5368.09,2432.07) 5391.02,2432.07 cw(c5413.96,2432.07) v1@5397.74,2448.28 ; v1(5391.02,2341.02) v1(5391.02,2455) 5295,2455 v1(5197.2,2357.2) 5165,2325 5165,2175 5190,2150 5190,2035 ; v1(5518.98,2341.02) 5537.95,2360 P3.6@5610,2360 P2.5@5800,2360 5965,2360 P1.5@6025,2300 ; v1@5518.98,2350.52 ccw(c5518.98,2373.46) 5535.19,2357.24 ccw(c5551.41,2341.02) v1@5528.48,2341.02 ; P3.6@5576.14,2353.64 ccw(c5560.77,2338.27) 5560.77,2360 ccw(c5560.77,2381.73) P3.6@5576.14,2366.36 ; P3.6@5643.86,2353.64 cw(c5659.23,2338.27) 5659.23,2360 cw(c5659.23,2381.73) P3.6@5643.86,2366.36 ; P2.5@5766.14,2353.64 ccw(c5750.77,2338.27) 5750.77,2360 ccw(c5750.77,2381.73) P2.5@5766.14,2366.36 ; P2.5@5833.86,2353.64 cw(c5849.23,2338.27) 5849.23,2360 cw(c5849.23,2381.73) P2.5@5833.86,2366.36 ; P1.5@5998.97,2300 ccw(c5936.14,2300) 5980.57,2344.43 ccw(c6025,2388.86) P1.5@6025,2326.03 ; P1.5@6005.97,2300 ccw(c5960.04,2300) 5992.52,2332.48 ccw(c6025,2364.96) P1.5@6025,2319.03
SCL/SCLK: AK8975.4 BMP280.4 HMC5983.1 MPU6/8xxx.23 MS5611.8 Q1.2 R1.2 | length 2939
  Top Layer w7: v1@5025.28,1918.72 ccw(c5009.06,1934.93) 5032,1934.93 ccw(c5054.94,1934.93) v1@5038.72,1918.72 ; v1(5032,1912) 5032,1962 v1(5095,2025) ; v1@5085.5,2025 cw(c5062.56,2025) 5078.78,2008.78 cw(c5095,1992.57) v1@5095,2015.5 ; AK8975.4@5095.56,2281.11 cw(c5102,2272.85) 5109.4,2280.25 ; AK8975.4@5099.86,2275.58 cw(c5106.9,2266.55) 5115,2274.65 ; v1@5108.28,2246.72 ccw(c5092.06,2262.93) 5115,2262.93 ccw(c5137.94,2262.93) v1@5121.72,2246.72 ; v1(5115,2240) 5115,2274.65 ; v1@5189.54,2284.54 ccw(c5173.32,2268.32) 5173.32,2291.26 ccw(c5173.32,2314.2) v1@5189.54,2297.98 ; v1(5196.26,2291.26) AK8975.4@5098.39,2291.26 5115,2274.65 ; MPU6/8xxx.23@5286.25,2225.74 5286.25,2291.25 5300.47,2305.47 HMC5983.1@5300.47,2523.98 ; v1@5293.75,2393.28 cw(c5277.54,2377.07) 5300.47,2377.07 cw(c5323.41,2377.07) v1@5307.19,2393.28 ; v1@5293.75,2406.72 ccw(c5277.54,2422.93) 5300.47,2422.93 ccw(c5323.41,2422.93) v1@5307.19,2406.72 ; R1.2@5658.47,2190 5663,2190 R1.2@5664.54,2191.54 ; R1.2@5660,2191.54 R1.2@5664.54,2191.54 ; R1.2@5672.02,2181.48 cw(c5696.29,2157.21) 5696.29,2191.54 cw(c5696.29,2225.86) R1.2@5672.02,2201.59 ; R1.2@5677.77,2191.54 cw(c5677.77,2165.21) Q1.2@5699.53,2180.03 ; R1.2@5677.98,2196.44 ccw(c5685.16,2223.24) Q1.2@5699.03,2199.21 ; 5683.36,2191.54 ccw(c5683.36,2208.96) Q1.2@5695.68,2196.64 ; 5685.93,2194.31 cw(c5681.29,2177) Q1.2@5698.37,2182.42 ; Q1.2@5693.75,2176.09 ccw(c5664.54,2156.2) R1.2@5664.54,2191.54 ; Q1.2@5708.66,2191.54 R1.2@5664.54,2191.54
  Top Layer w10: v1(5545,2190) R1.2@5658.47,2190 ; v1@5550.66,2184.34 cw(c5564.31,2170.69) 5564.31,2190 cw(c5564.31,2209.31) v1@5550.66,2195.66 ; 5623.62,2190 ccw(c5623.62,2225.94) R1.2@5649.04,2200.53 ; 5631.04,2190 cw(c5631.04,2164.54) R1.2@5649.04,2182.54 ; R1.2@5670.96,2182.54 cw(c5692.67,2160.84) 5692.67,2191.54 cw(c5692.67,2222.24) R1.2@5670.96,2200.53 ; R1.2@5673.34,2196.72 cw(c5665.31,2166.75) Q1.2@5693.69,2179.27 ; R1.2@5679.05,2195.18 ccw(c5686.12,2221.57) Q1.2@5699.78,2197.91 ; 5682.42,2191.54 cw(c5682.42,2163.02) Q1.2@5703.64,2182.07 ; 5686.98,2191.54 ccw(c5686.98,2205.34) Q1.2@5696.74,2195.58 ; Q1.2@5696.2,2175.39 ccw(c5660,2142.9) R1.2@5660,2191.54 Q1.2@5708.66,2191.54
  Bottom Layer w7: MS5611.8@4821.18,1907.79 cw(c4821.18,1893.24) 4831.47,1903.53 ; MS5611.8@4821.18,1935.79 4821.18,1913.82 4880,1855 5040,1855 5064,1879 BMP280.4@5064,1912 v1(5032,1912) ; MS5611.8@4829.49,1916.1 ccw(c4855.07,1916.1) 4836.99,1898.01 ; v1@5038.72,1905.28 cw(c5054.94,1889.07) 5054.94,1912 cw(c5054.94,1934.93) v1@5038.72,1918.72 ; BMP280.4@5053.73,1909.6 ccw(c5047.94,1903.82) 5047.94,1912 ccw(c5047.94,1920.18) BMP280.4@5053.73,1914.4 ; BMP280.4@5061.6,1909.6 cw(c5055.82,1903.82) 5064,1903.82 cw(c5072.18,1903.82) BMP280.4@5066.4,1909.6 ; v1@5088.28,2031.72 ccw(c5059.99,2060.01) 5100,2060.01 ; v1@5093.23,2026.77 ccw(c5076.89,2043.11) 5100,2043.11 ; v1(5095,2025) 5100,2030 5100,2225 ; v1@5105.52,2239.46 cw(c5086.61,2238.39) 5100,2225 ; v1@5114.46,2230.52 ccw(c5113.39,2211.61) 5100,2225 ; v1(5115,2240) 5100,2225 ; v1@5196.26,2300.76 ccw(c5196.26,2323.7) 5212.48,2307.48 ccw(c5228.69,2291.26) v1@5205.76,2291.26 ; v1@5196.91,2281.78 cw(c5198.16,2263.65) 5211.02,2276.5 ; v1@5205.74,2290.61 ccw(c5223.87,2289.36) 5211.02,2276.5 ; 5281.05,2376.05 ccw(c5257.11,2400) v1@5290.97,2400 ; 5291.98,2386.98 cw(c5300.47,2378.5) v1@5300.47,2390.5 ; 5293,2388 ccw(c5281,2400) v1@5297.97,2400 ; v1@5305,2400 v1(5196.26,2291.26) 5211.02,2276.5 ; 5522.81,2208.69 ccw(c5545,2230.88) v1@5545,2199.5 ; 5531.26,2200.24 cw(c5521.01,2190) v1@5535.5,2190 ; v1@5541.5,2190 5455,2276.5 5211.02,2276.5
  other v1: 5300.47,2400
SDA/SDI: AK8975.5 BMP280.3 HMC5983.16 MPU6/8xxx.24 MS5611.7 Q2.2 R2.1 | length 2449.2
  Top Layer w5: Q2.2@5708.66,2331.53 Q2.2@5715,2325.2
  Top Layer w7: AK8975.5@5138.74,2331.61 5268.89,2331.61 v1(5275,2330) ; v1@5205.5,2010 ccw(c5182.56,2010) 5198.78,2026.22 ccw(c5215,2042.43) v1@5215,2019.5 ; v1(5215,2010) 5195,2030 5195,2200 5221.24,2226.24 5270,2226.24 MPU6/8xxx.24@5270.5,2225.74 5270.5,2553.95 HMC5983.16@5268.98,2555.47 ; 5248.17,2331.61 cw(c5248.17,2303.17) v1@5268.28,2323.28 ; 5255.96,2331.61 ccw(c5255.96,2349.04) v1@5268.28,2336.72 ; HMC5983.16@5267.97,2554.47 cw(c5261.86,2548.35) 5270.5,2548.35 ; 5270.5,2296.21 cw(c5308.79,2296.21) v1@5281.72,2323.28 ; 5270.5,2313.11 cw(c5291.89,2313.11) v1@5276.77,2328.23 ; 5270.5,2346.89 ccw(c5291.89,2346.89) v1@5276.77,2331.77 ; 5270.5,2363.79 ccw(c5308.79,2363.79) v1@5281.72,2336.72 ; v1(5330,2365) 5626.53,2365 R2.1@5660,2331.53 ; v1@5336.72,2358.28 cw(c5352.94,2342.07) 5352.94,2365 cw(c5352.94,2387.93) v1@5336.72,2371.72 ; 5632.37,2359.16 cw(c5604.74,2331.53) R2.1@5643.81,2331.53 ; 5637.12,2354.41 ccw(c5658.03,2375.32) R2.1@5658.03,2345.75 ; R2.1@5644.32,2347.21 cw(c5628.64,2331.53) R2.1@5650.82,2331.53
  Top Layer w10: R2.1@5670.96,2322.54 cw(c5692.67,2300.83) 5692.67,2331.53 cw(c5692.67,2362.23) R2.1@5670.96,2340.53 ; R2.1@5673.34,2336.71 cw(c5665.31,2306.75) Q2.2@5693.69,2319.27 ; R2.1@5679.05,2335.18 ccw(c5686.12,2361.58) Q2.2@5699.78,2337.91 ; 5682.42,2331.53 cw(c5682.42,2303.02) Q2.2@5703.64,2322.07 ; 5686.97,2331.53 ccw(c5686.97,2345.35) Q2.2@5696.74,2335.58 ; Q2.2@5696.2,2315.39 ccw(c5660,2282.89) R2.1@5660,2331.53 Q2.2@5708.66,2331.53
  Bottom Layer w7: MS5611.7@4864.52,1910.23 cw(c4850.33,1896.04) 4870.39,1896.04 cw(c4890.46,1896.04) MS5611.7@4876.27,1910.23 ; MS5611.7@4870.39,1935.79 4870.39,1894.61 4890,1875 4985,1875 5000,1890 5000,1925 5013,1938 BMP280.3@5064,1938 5087,1938 5100,1925 5100,1895 5105,1890 5190,1890 5215,1915 v1(5215,2010) ; BMP280.3@5053.73,1935.6 ccw(c5047.94,1929.82) 5047.94,1938 ccw(c5047.94,1946.18) BMP280.3@5053.73,1940.4 ; BMP280.3@5074.27,1935.6 cw(c5080.06,1929.82) 5080.06,1938 cw(c5080.06,1946.18) BMP280.3@5074.27,1940.4 ; v1@5208.28,2003.28 cw(c5192.06,1987.07) 5215,1987.07 cw(c5237.94,1987.07) v1@5221.72,2003.28 ; v1(5275,2330) 5290,2330 ; v1@5282.36,2324 cw(c5295,2313.7) 5295,2330 ; v1@5282.36,2336 ccw(c5295,2346.3) 5295,2330 ; v1@5320.5,2365 cw(c5297.56,2365) 5313.78,2348.78 cw(c5330,2332.57) v1@5330,2355.5 ; v1(5330,2365) 5295,2330 ; 5290,2330 ccw(c5290,2322.91) 5283.59,2325.94 cw(c5290,2322.91) 5290,2330 ; 5290,2330 cw(c5290,2337.09) 5283.59,2334.06 ccw(c5290,2337.09) 5290,2330 ; 5290,2330 5295,2330
VIN: C1.1 D1.2 F1.2 ME6206.1 R3.2 R4.2 | length 1549
  Top Layer w7: ME6206.1@5680,1883 ME6206.1@5680,1883.74 ME6206.1@5680,1900 ; C1.1@5770,1901.54 5801,1901.54 ; C1.1@5783.2,1892.82 cw(c5801,1879.01) 5801,1901.54 ; C1.1@5783.2,1910.25 ccw(c5801,1924.06) 5801,1901.54 ; F1.2@5821.67,1890.28 ccw(c5802.54,1876.32) 5802.54,1900 ; F1.2@5821.67,1909.72 cw(c5802.54,1923.68) 5802.54,1900 ; F1.2@5824.79,1917.96 ccw(c5808.22,1939) 5835,1939 ; D1.2@5834.82,1960.84 cw(c5822.31,1948.34) 5840,1948.34 cw(c5857.69,1948.34) 5845.18,1960.84 cw(c5872.12,1933.91) 5872.12,1972 ; D1.2@5840,1983.74 D1.2@5840,1972 ; D1.2@5840.23,1965.79 cw(c5855.22,1950.81) 5855.22,1972 ; F1.2@5845.21,1917.96 cw(c5861.78,1939) 5835,1939 ; R4.2@5855,2296.54 5910,2241.54 5910,2200 5866.54,2156.54 R3.2@5855,2156.54 5894,2117.54 v1(5894,2066) ; R3.2@5856.97,2142.32 cw(c5856.97,2112.75) 5877.88,2133.66 ; R3.2@5856.97,2156.75 ccw(c5856.97,2180.37) R3.2@5873.67,2163.67 ; R3.2@5856.97,2163.75 ccw(c5856.97,2204.27) 5885.62,2175.62 ; R3.2@5856.97,2170.75 ccw(c5856.97,2228.17) 5897.57,2187.57 ; R4.2@5856.97,2282.32 cw(c5856.97,2252.75) 5877.88,2273.66 ; R3.2@5864.18,2156.54 ccw(c5886.36,2156.54) R3.2@5870.68,2140.86 ; R4.2@5864.18,2296.54 ccw(c5886.36,2296.54) R4.2@5870.68,2280.86 ; R4.2@5871.19,2296.54 ccw(c5910.26,2296.54) 5882.63,2268.91 ; R3.2@5874.47,2164.47 ccw(c5882.41,2156.54) 5871.19,2156.54 ccw(c5910.26,2156.54) 5882.63,2128.91 ; v1@5887.28,1965.28 ccw(c5871.06,1949.07) 5871.06,1972 ccw(c5871.06,1994.93) v1@5887.28,1978.72 ; v1@5887.28,2072.72 ccw(c5871.06,2088.93) 5894,2088.93 ccw(c5916.94,2088.93) v1@5900.72,2072.72 ; v1(5894,1972) D1.2@5840,1972 ; 5801,1901.54 5802.54,1900 ; 5802.54,1900 F1.2@5835,1900 5835,1939 ; 5835,1939 5840,1944 D1.2@5840,1972
  Top Layer w10: ME6206.1@5680,1900 F1.2@5835,1900 ; ME6206.1@5684.82,1895.66 cw(c5695.3,1885.17) 5695.3,1900 ; ME6206.1@5684.82,1905.29 ccw(c5697.58,1918.06) 5697.58,1900 ; 5733.62,1900 ccw(c5733.62,1935.94) C1.1@5759.04,1910.53 ; 5741.04,1900 cw(c5741.04,1874.54) C1.1@5759.04,1892.54 ; C1.1@5780.96,1892.54 cw(c5798.96,1874.54) 5798.96,1900 ; C1.1@5780.96,1910.53 ccw(c5806.38,1935.94) 5806.38,1900 ; F1.2@5824.39,1889.39 ccw(c5798.79,1863.79) 5798.79,1900 ccw(c5798.79,1936.21) F1.2@5824.39,1910.61
  Bottom Layer w7: v1@5887.28,1978.72 ccw(c5871.06,1994.93) 5894,1994.93 ccw(c5916.94,1994.93) v1@5900.72,1978.72 ; v1@5887.28,2059.28 cw(c5871.06,2043.07) 5894,2043.07 cw(c5916.94,2043.07) v1@5900.72,2059.28 ; v1(5894,1972) v1(5894,2066)
VIN5+: F1.1 P1.1 P2.1 P3.10 | length 1365
  Top Layer w10: F1.1@5925,1900 P1.1@6025,1900 ; F1.1@5935.61,1889.39 cw(c5961.21,1863.79) 5961.21,1900 cw(c5961.21,1936.21) F1.1@5935.61,1910.61 ; P1.1@6007.66,1882.66 ccw(c5965.79,1840.79) 5965.79,1900 ccw(c5965.79,1959.21) P1.1@6007.66,1917.34 ; P1.1@6014.73,1889.73 ccw(c5989.93,1864.93) 5989.93,1900 ccw(c5989.93,1935.07) P1.1@6014.73,1910.27
  Bottom Layer w10: P3.10@5610,2200 5700,2110 5725,2110 5770,2155 ; P3.10@5615,2200 ccw(c5627.07,2200) P3.10@5618.54,2191.46 ; P3.10@5625,2200 ccw(c5661.21,2200) 5635.61,2174.39 ; P3.10@5635,2200 ccw(c5695.36,2200) 5652.68,2157.32 ; P3.10@5645,2200 ccw(c5729.5,2200) 5669.75,2140.25 ; 5770,2175.86 cw(c5796.64,2175.86) P2.1@5777.8,2194.7 ; P2.1@5770,2200 5770,2155 ; P1.1@6007.66,1882.66 ccw(c5965.79,1840.79) 5965.79,1900 ccw(c5965.79,1959.21) P1.1@6007.66,1917.34 ; P1.1@6014.73,1889.73 ccw(c5989.93,1864.93) 5989.93,1900 ccw(c5989.93,1935.07) P1.1@6014.73,1910.27 ; P1.1@6025,1900 5824,1900 5770,1954 5770,2155
pads on no net: AK8975.1 AK8975.8 AK8975.9 AK8975.10 AK8975.12 AK8975.14 C15.1 C15.2 C16.1 C16.2 C17.1 C17.2 C18.1 C18.2 C19.1 C19.2 C20.1 C20.2 HMC5983.3 HMC5983.7 HMC5983.14 HMC5983.15 MPU6/8xxx.1 MPU6/8xxx.2 MPU6/8xxx.3 MPU6/8xxx.4 MPU6/8xxx.5 MPU6/8xxx.6 MPU6/8xxx.7 MPU6/8xxx.12 MPU6/8xxx.14 MPU6/8xxx.15 MPU6/8xxx.16 MPU6/8xxx.17 MPU6/8xxx.19 MPU6/8xxx.21 P2.0 P3.0 R11.1 R11.2 R12.1 R12.2 R13.1 R13.2 R14.1 R14.2 R15.1 R15.2 R16.1 R16.2 R17.1 R17.2 R18.1 R18.2 R19.1 R19.2 R20.1 R20.2 R21.1 R21.2 R22.1 R22.2

## Polygon pours and split planes (outlines as drawn)
GND on Bottom Layer "Bottom To GND" (solid, remove dead copper, pour order 2): 4425,3225 6175,3225 6175,1475 4425,1475 4425,3225
GND on Top Layer "Top To GND" (solid, remove dead copper, pour order 4): 4425,3225 6175,3225 6175,1475 4425,1475 4425,3225

## Keep-outs
Keep-Out Layer:
  lines w7: 4589.54,1842.69 ccw(c4619.96,1665.28) 4799.88,1659.85 ; 4590,1845 ccw(c4589.09,2015.84) 4759.94,2015.19 ; 4760,2015.19 4760,2675.06 ; 4760,2822.18 ccw(c4735,2822.18) 4735,2847.18 4590.36,2847.18 cw(c4619.93,3024.8) 4799.93,3030 ; 4760.19,2675.06 4760.19,2822.18 ; 4800,3030 ccw(c4970.84,3030.91) 4970.19,2860.06 ; 4800.06,1659.81 cw(c4970.91,1659.16) 4970,1830 5629.81,1830 ; 4970.19,2860 5630.06,2860 ; 5629.81,1829.94 cw(c5629.16,1659.09) 5800,1660 ; 5630.06,2859.81 ccw(c5629.16,3030.65) 5800,3030 ; 5800.16,3030 cw(c5980.19,3026.42) 6104.19,2895.85 ccw(c6201.69,2807.1) 6071.02,2824.64 ; 5800.69,1660.02 ccw(c5980.58,1666.14) 6100.56,1800.33 cw(c6250.81,1899.02) 6071.23,1890.75 ; 6070,1889.37 6070,2824.96

## Other copper
Top Layer:
  pour cut-out: 5215,2255 5405,2255 5405,2065 5215,2065
  pour cut-out: 5235,2680 5425,2680 5425,2490 5235,2490
  pour cut-out: 4945,2485 5175,2485 5175,2255 4945,2255
  pour cut-out: 4775,2085 5015,2085 5015,1895 4775,1895
  pour cut-out: 5160,2005 5160,1895 5040,1895 5040,2005
Bottom Layer:
  pour cut-out: 5215,2255 5405,2255 5405,2065 5215,2065
  pour cut-out: 5235,2680 5425,2680 5425,2490 5235,2490
  pour cut-out: 4945,2485 5175,2485 5175,2255 4945,2255
  pour cut-out: 4775,2085 5015,2085 5015,1895 4775,1895
  pour cut-out: 5040,2005 5160,2005 5160,1895 5040,1895

## Silkscreen, mask and mechanical layers (free items; w line width, h text height)
Top Overlay:
  circle w10: c5055,2085 r25
  circle w10: c4165,1445 r25
  lines w7: 3914.82,1459.93 ccw(c3975,1485) 4033.31,1455.85 4005.85,1455.85 ; 4165.85,1234.15 4165.85,1206.69 cw(c4195,1265) 4169.93,1325.18 ; 4175,1480 4162.5,1492.5 4177.5,1507.5 ; 4804.82,2099.93 ccw(c4865,2125) 4923.31,2095.85 4895.85,2095.85 ; 5055.85,1874.15 5055.85,1846.69 cw(c5085,1905) 5059.93,1965.18 ; 5065,2120 5052.5,2132.5 5067.5,2147.5 ; 3975,1540 3975,1265 4250,1265 ; 3975,1540 3930,1495 4020,1495 3975,1540 ; 4250,1265 4205,1310 4205,1220 4250,1265 ; 4865,2180 4910,2135 4820,2135 4865,2180 ; 4865,2180 4865,1905 5140,1905 ; 5140,1905 5095,1860 5095,1950 5140,1905
  lines w10: 4114.75,1444.75 ccw(c4165,1444.75) 4165,1495 ; 5004.75,2084.75 ccw(c5055,2084.75) 5055,2135
  text "QFN下面尽量不要有走线，有也要保证是地线，以免短路" at 5270,3760 h60
  text "地磁计下面千万别走线，要挖铜，同时保证好焊接" at 5270,3610 h60
  text "每个MEMS下方都大面积挖铜，以便手工焊接，包括气压计" at 5265,3425 h60
  text "减震球固定孔都向边移位0.5mm，左上的孔要根据SPI1插口位置进行切割" at 5270,3340 h60
  text "HMCCs" at 5845,2785 h40
  text "CS上拉" at 5690,2700 h40
  text "BMPCs" at 5845,2685 h40
  text "PM-IMU" at 4795,2630 h60
  text "MSCs" at 5870,2585 h40
  text "AKCs" at 5870,2485 h40
  text "MPUCs" at 5845,2385 h40
  text "SDO" at 5885,2285 h40
  text "SDI" at 5900,2185 h40
  text "Y" at 4765,2125 h90
  text "Z" at 4975,2120 h90
  text "SCL" at 5890,2085 h40
  text "GND" at 5885,1985 h40
  text "X" at 5130,1960 h90
  text "Vin 5V0" at 5860,1945 h40
  text "PM-IMU" at 5165,1850 h60
  text "17.04" at 5385,1850 h60
  text "Y" at 3875,1485 h90
  text "Z" at 4085,1480 h90
  text "X" at 4240,1320 h90
Bottom Overlay:
  text "飞行控制器 - IMU板" at 5255,2525 h60
  text "2017.04" at 4990,2445 h60